# Altium PCB LAB2.PcbDoc
Units mil, origin at the board's own origin, x right, y up, seen from the top; angles counter-clockwise.
Board outline 6000 x 4000 mil, 2 copper layers (Top Layer, Bottom Layer); 50 components, 33 nets, 130 pads, 85 vias.
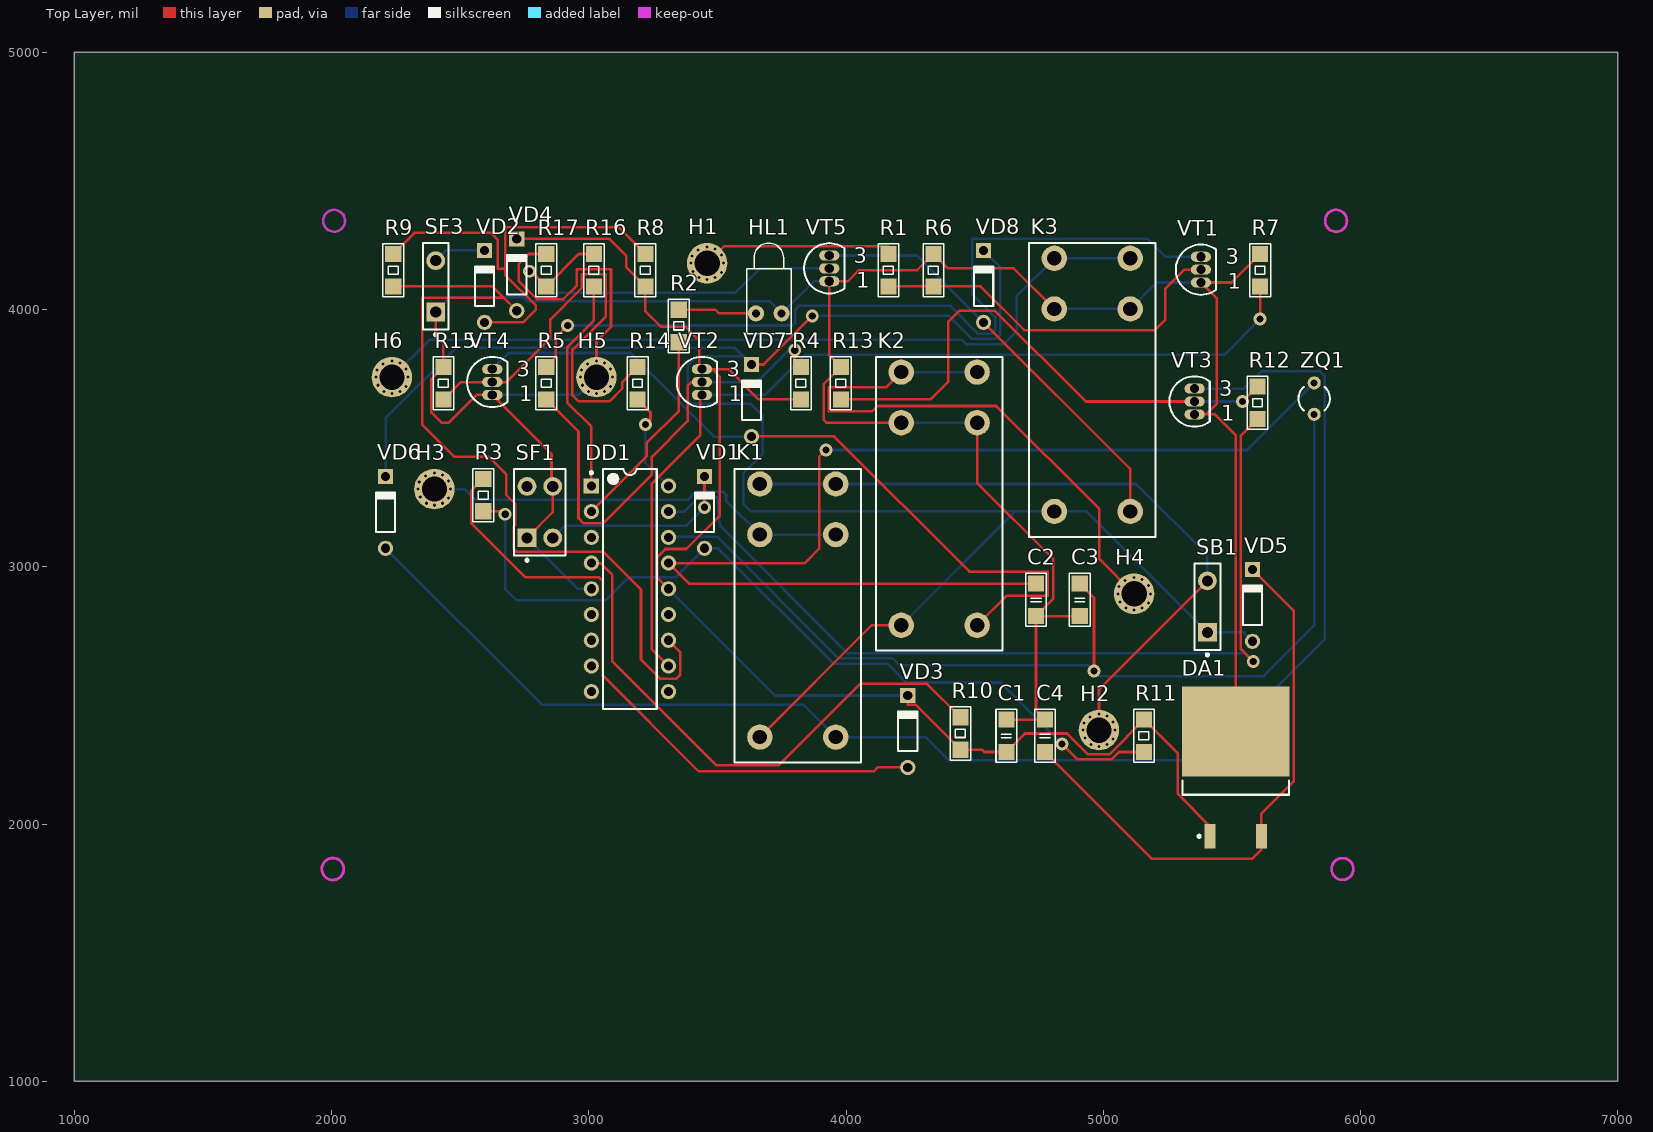
[diagram p0: Top Layer view]
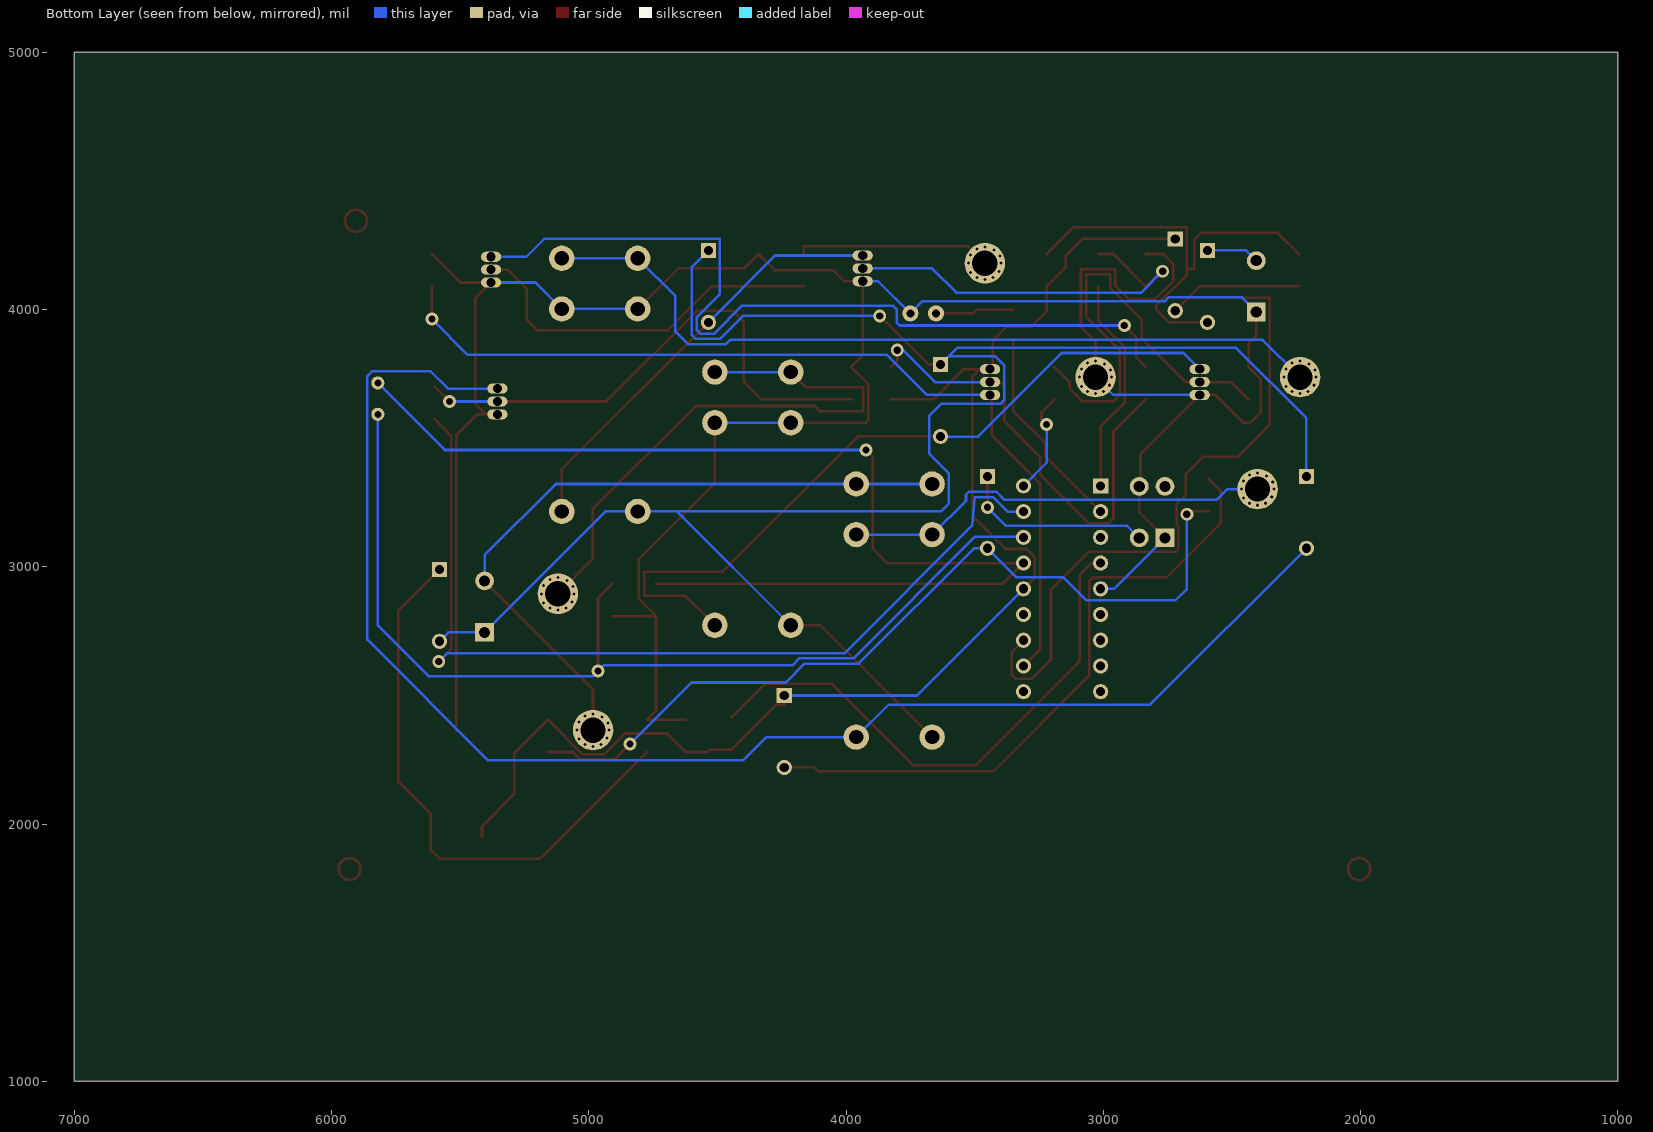
[diagram p1: Bottom Layer view, seen from below]

## Layer stack, top to bottom
Top Solder: solder mask 0.4, Solder Resist, Dk 3.5
Top Layer: signal copper 1.4
Dielectric 1: dielectric 12.6, FR-4, Dk 4.8
Bottom Layer: signal copper 1.4
Bottom Solder: solder mask 0.4, Solder Resist, Dk 3.5

## Board outline
1000,1000 7000,1000 7000,5000 1000,5000

## Design rules (kind name [scope] priority, off if disabled: settings)
Clearance [All] p1: gap=10 ignorepadtopadclearanceinfootprint=FALSE except(0: Arc-Hole Track-Hole SMDPad-Hole THPad-Hole Via-Hole Fill-Hole Poly-Hole Region-Hole Text-Hole)
PolygonConnect [All] p1: connectstyle=Relief reliefconductorwidth=10 reliefentries=4 polygonreliefangle="90 Angle" airgapwidth=10
RoutingVias [All] p1: holewidth=28 width=50 viastyle="Through Hole" minholewidth=28 minwidth=50 maxholewidth=28 maxwidth=50
SolderMaskExpansion [All] p1: expansion=4 istentingtop=FALSE
Width [All] p1: maxlimit=10 minlimit=10 preferedwidth=10
30 further rules are at their usual default settings.

## Components (designator, comment, footprint, x,y, rotation, side; value= is the part's Value field where it differs from the comment)
C1 "0.1uF" "CAPACITOR 1206" 4623.5,2280 r90 top
C2 "22" "CAPACITOR 1206" 4738.5,2808.45 r90 top
C3 "22" "CAPACITOR 1206" 4908.5,2808.45 r90 top
C4 "0.1uF" "CAPACITOR 1206" 4773.5,2280 r90 top
DA1 "78LO5" D2PAK_N 5515,2220 r90 top
DD1 "PIC16F84A-04I/P" PDIP300-P18 3160,2914.37 r0 top
H1 "До замка запалювання" "Hole 2.5" 3460,4180 r0 top
H2 "+12В" "Hole 2.5" 4983.5,2365 r0 top
H3 "До сирени" "Hole 2.5" 2400,3302.1 r0 top
H4 "До системи запалювання" "Hole 2.5" 5120,2895 r0 top
H5 "Загальний" "Hole 2.5" 3030,3737.1 r0 top
H6 "Резерв" "Hole 2.5" 2235,3737.1 r0 top
HL1 "L-56BSRD-B" LED-1 3700,3985 r90 top
K1 "Relay SPST" g2rl-1a-e 3960.28,2337.6 r90 top
K2 "Relay SPST" g2rl-1a-e 4510,2772.6 r90 top
K3 "Relay SPST" g2rl-1a-e 5105,3215 r90 top
R1 "33K" "Resistor 1206" 4165,4090 r90 top
R2 "1K" "Resistor 1206" 3350,3873.16 r90 top
R3 "1K" "Resistor 1206" 2590,3215.55 r90 top
R4 "100K" "Resistor 1206" 3825,3650.55 r90 top
R5 "10K" "Resistor 1206" 2835,3650.55 r90 top
R6 "15K" "Resistor 1206" 4340,4090 r90 top
R7 "91K" "Resistor 1206" 5610,4090 r90 top
R8 "10K" "Resistor 1206" 3220,4090 r90 top
R9 "1K" "Resistor 1206" 2240,4090 r90 top
R10 "10K" "Resistor 1206" 4445,2289.02 r90 top
R11 "10K" "Resistor 1206" 5158.5,2280 r90 top
R12 "4,7K" "Resistor 1206" 5600,3575 r90 top
R13 "10K" "Resistor 1206" 3980,3650.55 r90 top
R14 "4,7K" "Resistor 1206" 3190,3650.55 r90 top
R15 "10K" "Resistor 1206" 2435,3650.55 r90 top
R16 "4,7K" "Resistor 1206" 3020,4090 r90 top
R17 "10K" "Resistor 1206" 2835,4090 r90 top
SB1 "SW-PB" SPST-2 5405,2845 r90 top
SF1 "SW-DPST" DPST-4 2810,3212.4 r90 top
SF3 "SW-SPST" SPST-2 2405,4090 r90 top
VD1 "КД102Б" DO-35 3450,3211.55 r90 top
VD2 "КД102Б" DO-35 2595,4090 r90 top
VD3 "КД522Б" DO-35 4240,2359.76 r90 top
VD4 "КД522Б" DO-35 2720,4135 r90 top
VD5 "КД522Б" DO-35 5580,2850 r90 top
VD6 "КД522Б" DO-35 2210,3211.55 r90 top
VD7 "КД522Б" DO-35 3632.28,3646.55 r90 top
VD8 "КД522Б" DO-35 4535,4090 r90 top
VT1 "КТ503Е" TO-92A 5380,4155 r0 top
VT2 "КТ502Б" TO-92A 3440,3718.11 r0 top
VT3 "КТ315Б" TO-92A 5355,3642.56 r0 top
VT4 "КТ315Б" TO-92A 2625,3718.11 r0 top
VT5 "КТ315Б" TO-92A 3935,4160 r0 top
ZQ1 "4MHZ" R38 5820,3653.68 r0 top

## Footprints (in the part's own frame and the unit in brackets; to place one, negate y for a bottom-side part, rotate by r counter-clockwise, add the part's x,y. Pads: shape width x height; smd on the part's side, far side on the other; paste and mask are expansions set on the pad)
"CAPACITOR 1206" [mm]
  rect 1.6x1.6 smd: 1(0,0) 2(3.2,0)
  silkscreen extent -1.02,-1.02 4.22,1.02, body extent 0.01,-0.8 3.22,0.8, height 1.26
D2PAK_N [mm] "D2-PAK, 4-Leads, Body 8.8x10.4mm, Pitch 2.54mm, Lead Span 15.1mm, IPC Medium Density"
  rect 2.4x1.05 smd: 1(-6.8,2.54) 3(-6.8,-2.54)
  rect 8.9x10.65 smd: 2(3.55,0)
  silkscreen extent -6.92,-5.25 -1.3,5.25, body extent -2.7,-5.28 6.3,5.28, height 4.69
DO-35 [mm] "Diode, Axial; Body 3.8 x 1.9 mm (LxDia. max), Lead Dia. 0.53 mm (max)"
  round 1.5 hole 0.9: 1(-3.55,0)
  rect 1.5x1.5 hole 0.9: 2(3.55,0)
  silkscreen extent -1.95,-0.95 2.05,0.95
DPST-4 [mm] "Switch; 4 Leads"
  rect 1.85x1.85 hole 1.1: 1(-2.54,1.27)
  round 1.85 hole 1.1: 2(-2.54,-1.27) 3(2.54,-1.27) 4(2.54,1.27)
  silkscreen extent -4.88,-2.54 4.28,2.54
g2rl-1a-e [mm] "SPST relay 16A"
  round 2.5 hole 1.4: 0(0,0) 1(0,7.5) 2(20,0) 2(20,7.5) 3(25,0) 3(25,7.5)
  silkscreen extent -2.5,-2.5 26.5,10, body extent -2.6,-2.6 26.4,10.1, height 15.7
"Hole 2.5" [mm]
  round 4 hole 2.5: 0(0,0)
LED-1 [mm] "LED; 2 Leads"
  round 1.6 hole 0.8: 1(0,1.27) 2(0,-1.27)
  silkscreen extent -2,-2.2 6.95,2.2
PDIP300-P18 [mm] "DIP, 18-Pin, Row Spacing 7.62 mm, Pitch 2.54 mm"
  rect 1.5x1.5 hole 0.9: 1(-3.81,10.16)
  round 1.5 hole 0.9: 2(-3.81,7.62) 3(-3.81,5.08) 4(-3.81,2.54) 5(-3.81,0) 6(-3.81,-2.54) 7(-3.81,-5.08) 8(-3.81,-7.62) 9(-3.81,-10.16) 10(3.81,-10.16) 11(3.81,-7.62) 12(3.81,-5.08) 13(3.81,-2.54) 14(3.81,0) 15(3.81,2.54) 16(3.81,5.08) 17(3.81,7.62) 18(3.81,10.16)
  silkscreen extent -3.93,-11.85 2.65,11.85, body extent -3.6,-11.8 3.6,11.8, height 5.33
R38 [mm] "Crystal, Thru-Hole; 2 Leads; Body 3.1 x 8.2 mm (Dia.xH)"
  round 1.3 hole 0.7: 1(0,1.55) 2(0,-1.55)
  silkscreen extent -1.55,-1.19 1.55,1.17
"Resistor 1206" [mm]
  rect 1.6x1.6 smd: 1(0,0) 2(3.2,0)
  silkscreen extent -1.02,-1.02 4.22,1.02, body extent -0.03,-0.79 3.4,0.8, height 0.5
SPST-2 [mm] "Switch; 2 Leads"
  rect 1.85x1.85 hole 1.1: 1(-2.54,0)
  round 1.85 hole 1.1: 2(2.54,0)
  silkscreen extent -4.89,-1.27 4.28,1.27
TO-92A [mm] "TO, Flat Index; 3 In-Line, Axial Leads; Body Dia. 4.5mm; Leads 0.51 x 0.48 mm (max)"
  oval 2x1 hole 0.9: 1(0,-1.27) 2(0,0) 3(0,1.27)
  silkscreen extent -2.48,-2.48 1.5,2.48

## Part data
C1 C2 C3 C4: library part Capasitor
DA1: library part "Volt Reg", "Voltage Regulator", LatestRevisionDate=29-May-2009, LatestRevisionNote="IPC-7351 Footprint Added.", PackageDescription="3-Pin Transistor Outline Package 2.54 mm Pitch, 15.1 mm Lead Span", PackageReference=D2PAK, Published=24-Mar-1999, Publisher="Altium Limited"
DD1: library part CMP-0115-00205-1, "Enhanced FLASH/EEPROM 8-Bit Microcontroller, 1K (x14-Bit words) FLASH, 68 Bytes RAM, 4 MHz, 18-Pin PDIP, Standard VDD Range, Industrial Temperature", Code_JEDEC=MS-001, DatasheetVersion="revB, Aug-2001", PackageDescription="18-Lead Plastic Dual In-Line (P) - 300 mil Body [PDIP]", PackageReference=PDIP300-P18, PackageVersion="revBB, Aug-2009"
H1 H2 H3 H4 H5 H6: library part Hole
HL1: library part LED1, "Typical RED GaAs LED", LatestRevisionDate=08-Jul-2005, LatestRevisionNote="Mech Layer 1 removed.", PackageDescription="LED; 2 Leads", PackageReference=LED-1, Published=8-Jun-2000, Publisher="Altium Limited"
R1 R2 R3 R4 R5 R6 R7 R8 R9 R10 R11 R12 R13 R14 R15 R16 R17: library part Resistor
SB1: "Switch", LatestRevisionDate=17-Jul-2002, LatestRevisionNote="Re-released for DXP Platform.", PackageDescription="Switch; 2 Leads", PackageReference=SPST-2, Published=24-Mar-1999, Publisher="Altium Limited"
SF1: "Double-Pole, Single-Throw Switch", LatestRevisionDate=17-Jul-2002, LatestRevisionNote="Re-released for DXP Platform.", PackageDescription="Switch; 4 Leads", PackageReference=DPST-4, Published=24-Mar-1999, Publisher="Altium Limited"
SF3: "Single-Pole, Single-Throw Switch", LatestRevisionDate=17-Jul-2002, LatestRevisionNote="Re-released for DXP Platform.", PackageDescription="Switch; 2 Leads", PackageReference=SPST-2, Published=24-Mar-1999, Publisher="Altium Limited"
VD1 VD2 VD3 VD4 VD5 VD6 VD7 VD8: library part "Diode 1N4448", "High Conductance Fast Diode", Code_JEDEC=DO-204-AH, ComponentLink1Description="Manufacturer Link", ComponentLink1URL=http://www.fairchildsemi.com/, ComponentLink2Description=Datasheet, ComponentLink2URL=http://www.fairchildsemi.com/ds/1N%2F1N4448.pdf, DatasheetVersion=1997, LatestRevisionDate=17-Jul-2002, LatestRevisionNote="Re-released for DXP Platform.", PackageDescription="Diode, Axial; Body 3.8 x 1.9 mm (LxDia. max), Lead Dia. 0.53 mm (max)", PackageReference=DO-35, Published=8-Jun-2000, Publisher="Altium Limited"
VT1 VT2 VT3 VT4 VT5: library part 2N3904, "NPN General Purpose Amplifier", ComponentLink1Description="Manufacturer Link", ComponentLink1URL=http://www.fairchildsemi.com/, ComponentLink2Description=Datasheet, ComponentLink2URL=http://www.fairchildsemi.com/ds/2N%2F2N3904.pdf, DatasheetVersion=1997, LatestRevisionDate=17-Jan-2003, LatestRevisionNote="PCB Footprint replaced", PackageDescription="TO, Flat Index; 3 In-Line, Axial Leads; Body Dia. 4.5mm; Leads 0.51 x 0.48 mm (max)", PackageReference=TO-92A, PackageVersion=Sep-1998, Published=8-Jun-2000, Publisher="Altium Limited"
ZQ1: library part XTAL, "Crystal Oscillator", LatestRevisionDate=17-Jul-2002, LatestRevisionNote="Re-released for DXP Platform.", PackageDescription="Crystal, Thru-Hole; 2 Leads; Body 3.1 x 8.2 mm (Dia.xH)", PackageReference=R38, Published=8-Jun-2000, Publisher="Altium Limited"

## Via types
v1: diameter 11.81, hole 11.81, Top Layer to Bottom Layer, 72 vias
v2: diameter 50, hole 28, Top Layer to Bottom Layer, 13 vias

## Nets (pads, with @x,y where several pads share a name; then routed paths per layer and width w, separated by ;. In a path a pad name is that pad's centre, name@x,y a point inside that pad or via, vN(x,y) a via of type N, cw(c..) or ccw(c..) an arc to the next point about the centre after c; other vN are vias at no path point)
GND: C1.2 C2.1 C3.1 C4.2 DA1.2 DD1.5 H5.0 HL1.2 K2.2 K3.2 R6.2 R7.2 R13.2 R15.2 R17.2 SF1.1 SF1.3 SF3.1 VT1.1 VT3.1 VT4.1 VT5.1 | length 11541.5
  Top Layer w10: SF3.1 2405,3898 2435,3868 R15.2 2388,3729.54 2388,3600 2428,3560 2455.89,3560 2564,3668.11 VT4.1 2855,3438.11 2855,3312.4 SF1.3 2860,3212.4 SF1.1 ; R17.2 2766.49,4215.98 2728.5,4178 2728.5,4109.5 2798,4040 2900,4040 2953.5,4093.5 2953.5,4156.5 3086.5,4156.5 3086.5,3932.5 3030,3876 v1(3030,3800.09) H5.0 ; K2.2@4214.72,3560 3923.51,3560 3913.5,3570 3913.5,3710.04 R13.2 3935,3821.54 VT5.1 4007,4110 4050,4153 4277.02,4153 R6.2 4395.98,4160 4652.13,4160 K3.2@4809.72,4002.4 ; K2.2@4510,3560 4510,3326.2 4805,3031.21 4805,2874.94 C2.1 ; C1.2 C4.2 4738.5,2440.98 C2.1 ; C3.1 C2.1 ; VT3.1 5400,3592.56 ; DA1.2 5515,3511.56 5434,3592.56 5400,3592.56 ; R7.2 5499.02,4105 VT1.1 5441,4044 5441,3633.56 5400,3592.56
  Bottom Layer w10: SF3.1 2463,4048 2745,4048 2760,4033 3702,4033 HL1.2 3875,4110 VT5.1 ; VT4.1 2961.01,3668.11 H5.0 ; SF1.1 2958.03,2914.37 DD1.5 ; K2.2@4214.72,3560 K2.2@4510,3560 ; K3.2@4809.72,4002.4 5105,4002.4 5207.6,4105 VT1.1
  other v1: 3030,3674.11 2998.5,3681.98 3061.5,3681.98 3085.12,3701.67 2974.88,3705.61 2967.01,3737.1 3092.99,3737.1 2970.94,3764.66 3085.12,3768.6 2994.57,3788.28 3061.5,3792.22
NetC1_1: C1.1 DA1.1 DD1.14 R4.1 R8.1 R10.1 R11.2 VD3.2 VD4.2 VT2.3 | length 5356.6
  Top Layer w10: VD4.2 3080,4274.76 3146,4208.76 3146,4164 R8.1 3220,3993 3280,3933 3376,3933 3429,3880 3429,3768.11 VT2.3 3480,3768.11 ; DD1.14 3265.47,2958.9 3265.47,3036.47 3298,3069 3379,3069 3510,3200 3510,3738.11 3480,3768.11 ; R4.1 3660.45,3650.55 3542.89,3768.11 3480,3768.11 ; VD3.2 4240,2464 4270.02,2464 R10.1 4529,2289.02 4538.02,2280 C1.1 4695.32,2351.82 4860,2351.82 4940.82,2271 5023.52,2271 R11.2 5290,2274.48 5290,2116 5415,1991 DA1.1
  Bottom Layer w10: DD1.14 3724.84,2499.53 VD3.2
NetC2_2: C2.2 DD1.15 ZQ1.1 | length 4471.2
  Top Layer w10: v2(3922,3454) 3896,3428 3896,3070.37 3840,3014.37 DD1.15 3389.94,2934.43 C2.2
  Bottom Layer w10: v2(3922,3454) 5559.3,3454 ZQ1.1
NetC3_2: C3.2 DD1.16 ZQ1.2 | length 4000.3
  Top Layer w10: C3.2 4964,2878.93 v2(4964,2595)
  Bottom Layer w10: DD1.16 3312.63,3117 3497.66,3117 3971.1,2643.56 4182,2643.56 4208.56,2617 4942,2617 v2(4964,2595) 4984,2575 5623,2575 5820,2772 ZQ1.2
NetC4_1: C4.1 DA1.3 VD5.2 | length 2235.7
  Top Layer w10: C4.1 5188.5,1865 5580,1865 5615,1900 DA1.3 5615,2040 5740,2165 5740,2829.76 VD5.2
NetDD1_1: DD1.1 R16.1 | length 857.4
  Top Layer w10: DD1.1 3010,3545.36 2916.26,3639.1 2916.26,3853.26 3020,3957 R16.1
NetDD1_2: DD1.2 R2.1 | length 799.6
  Top Layer w10: DD1.2 3225,3429.37 3225,3480.29 3350,3605.29 R2.1
NetDD1_4: DD1.4 R10.2 | length 2142.6
  Top Layer w10: DD1.4 3046.38,3014.37 3091,2969.75 3091,2634 3497,2228 3738,2228 4055,2545 4315,2545 R10.2
NetDD1_11: DD1.11 R7.1 VT2.1 | length 3583.7
  Top Layer w10: DD1.11 3245.47,2678.9 3245.47,3323.27 3434,3511.8 3434,3668.11 VT2.1 ; v2(5610,3963) R7.1
  Bottom Layer w10: VT2.1 3685.11,3668.11 3841,3824 5471,3824 v2(5610,3963)
NetDD1_12: DD1.12 R9.1 VD4.1 | length 3218.4
  Top Layer w10: R9.1 2625.24,4090 2669.24,4046 ; VD4.1 2669.24,4046 ; DD1.12 3355,2669.37 3355,2579 3340,2564 3279,2564 3203,2640 3203,2911 3055,3059 2719,3059 2708,3070 2708,3157 2715,3164 2715,3244 2679,3280 2679,3360 2612,3427 2478,3427 2353,3552 2353,4046 2669.24,4046
NetDD1_17: DD1.17 R12.1 | length 3606.3
  Top Layer w10: v2(5583,2632) 5535,2680 5535,3510 R12.1
  Bottom Layer w10: DD1.17 3371.37,3214.37 3428,3271 3500,3271 3510,3160.28 4006.71,2663.56 5551.44,2663.56 v2(5583,2632)
NetDD1_18: DD1.18 R14.1 | length 402.5
  Top Layer w10: R14.1 3240,3600.55 3240,3573 v2(3220,3553)
  Bottom Layer w10: v2(3220,3553) 3220,3404.37 DD1.18
NetH1_0: H1.0 R1.2 | length 762.4
  Top Layer w10: H1.0 3526,4246 4165,4246 R1.2
  other v1: 3460,4117.01 3428.5,4124.88 3491.5,4124.88 3515.12,4144.57 3404.88,4148.5 3397.01,4180 3522.99,4180 3400.94,4207.56 3515.12,4211.5 3424.57,4231.18 3491.5,4235.12 3460,4242.99
NetH2_0: H2.0 K1.3 SB1.2 | length 2709.3
  Top Layer w10: H2.0 v1(4983.5,2427.99) 4983.5,2523.5 SB1.2
  Bottom Layer w10: K1.3@3665,3321.85 3960.28,3321.85 5128.15,3321.85 5405,3045 SB1.2
  other v1: 4983.5,2302.01 4952,2309.88 5015,2309.88 5038.62,2329.57 4928.38,2333.5 4920.51,2365 5046.49,2365 4924.44,2392.56 5038.62,2396.5 4948.07,2416.18 5015,2420.12
NetH3_0: H3.0 K1.2 | length 1673.5
  Bottom Layer w10: H3.0 v1(2462.99,3302.1) 2516.9,3302.1 2559,3260 3383.41,3260 3415,3291.59 3521.88,3291.59 3533.46,3280 3533.46,3256.54 3665,3125 K1.2@3960.28,3125
  other v1: 2400,3239.11 2368.5,3246.98 2431.5,3246.98 2455.12,3266.67 2344.88,3270.61 2337.01,3302.1 2340.94,3329.66 2455.12,3333.6 2364.57,3353.28 2431.5,3357.22 2400,3365.09
NetH4_0: H4.0 K2.3 | length 2305.5
  Top Layer w10: K2.3@4214.72,3756.85 4154.92,3697.05 3933.5,3697.05 3933.5,3604 4101,3604 4122,3625 4584,3625 4985,3224 4985,3030 H4.0
  Bottom Layer w10: K2.3@4214.72,3756.85 K2.3@4510,3756.85
  other v1: 5120,2832.01 5088.5,2839.88 5151.5,2839.88 5175.12,2859.57 5064.88,2863.5 5057.01,2895 5182.99,2895 5060.94,2922.56 5175.12,2926.5 5084.57,2946.18 5151.5,2950.12 5120,2957.99
NetH6_0: H6.0 K3.3 | length 3156.4
  Bottom Layer w10: H6.0 2380.29,3882.39 4450.47,3882.39 4467.16,3865.71 4614.71,3865.71 4663,3914 4663,4052.53 4809.72,4199.25 K3.3@5105,4199.25
  other v1: 2235,3674.11 2203.5,3681.98 2266.5,3681.98 2290.12,3701.67 2179.88,3705.61 2172.01,3737.1 2297.99,3737.1 2175.94,3764.66 2290.12,3768.6 2199.57,3788.28 2266.5,3792.22 2235,3800.09
NetHL1_1: HL1.1 R2.2 | length 305.9
  Top Layer w10: R2.2 3492,3999.14 3506.14,3985 HL1.1
NetK1_0: K1.0 VD6.1 VT3.3 | length 5753.7
  Bottom Layer w10: VD6.1 2817.79,2464 3833.87,2464 K1.0 4309.4,2337.6 4400,2247 5391,2247 5861,2717 5861,3742 5843,3760 5614.44,3760 5547,3692.56 VT3.3
NetK1_1: K1.1 K2.1 K3.1 SB1.1 VD5.1 VD6.2 VD7.2 VD8.2 | length 7845.8
  Top Layer w10: VD7.2 3680,3786.32 v2(3868.68,3975) ; K1.1 4100,2772.6 K2.1
  Bottom Layer w10: VD6.2 2210,3578 2483,3851 3567.6,3851 3599.6,3819 ; VD7.2 3599.6,3819 ; v2(3868.68,3975) 4400.47,3975 4489.76,3885.71 4585.24,3885.71 4599.53,3900 4599.53,4165.24 VD8.2 ; K2.1 4657.13,3215 ; VD5.1 5545.24,2745 SB1.1 4935,3215 K3.1 4657.13,3215 ; 3599.6,3819 3420,3819 3385,3784 3385,3648 3400,3633 3630,3633 3677,3586 3677,3440 3600,3363 3600,3246 3631,3215 4657.13,3215
NetK2_0: K2.0 VD7.1 VT4.3 | length 2955.1
  Top Layer w10: VD7.1 3953.9,3506.79 4479.69,2981 4785,2981 4785,2887.94 4625.34,2887.94 K2.0
  Bottom Layer w10: VT4.3 2687.89,3831 3161.57,3831 3486.57,3506 3632.28,3506 VD7.1
NetK3_0: K3.0 VD8.1 VT5.3 | length 1678.9
  Top Layer w10: VD8.1 5105,3380.24 K3.0
  Bottom Layer w10: VT5.3 4275.24,4210 VD8.1
NetR1_1: R1.1 R6.1 VT1.2 | length 1453.1
  Top Layer w10: R1.1 R6.1 4523,4090 4693,3920 5201,3920 5241,3960 5241,4080 5316,4155 VT1.2
NetR3_1: R3.1 R11.1 VD1.1 | length 3317.9
  Top Layer w10: R3.1 2663.45,3215.55 v2(2675,3204) ; v2(4840,2311) 4900,2251 5031.8,2251 5060.8,2280 R11.1
  Bottom Layer w10: v2(2675,3204) 2675,2914 2720,2869 3065,2869 3155,2959 3337.21,2959 VD1.1 3503.07,3071.79 3951.29,2623.56 4160.44,2623.56 4234,2550 4601,2550 v2(4840,2311)
NetR3_2: R3.2 VD3.1 | length 2508.9
  Top Layer w10: R3.2 2543,3294.54 2543,3170 2754,2959 3040,2959 3055,2944 3055,2577 3427,2205 4108,2205 4123,2220 VD3.1
NetR4_2: R4.2 R5.1 VT2.2 | length 1836.3
  Top Layer w10: R5.1 2960,3525.55 2960,3189 2980,3169 3055,3169 3245,3359 3245,3427 3384,3566 3384,3702.11 3400,3718.11 VT2.2 ; v2(3801,3842) 3801,3800.54 R4.2
  Bottom Layer w10: VT2.2 3654.11,3718.11 3778,3842 v2(3801,3842)
NetR5_2: R5.2 VT1.3 | length 3280.8
  Top Layer w10: R5.2 2871,3812.54 2871,3891 v2(2918,3938)
  Bottom Layer w10: v2(2918,3938) 3791,3938 3803,3950 3803,4000 3818,4015 4404,4015 4513.29,3905.71 4565.24,3905.71 4579.53,3920 4579.53,3971.47 4490,4061 4490,4275 5173,4275 5243,4205 VT1.3
NetR8_2: R8.2 R9.2 VD2.1 | length 1769.7
  Top Layer w10: R9.2 2322.02,4298 2620,4298 2646,4272 2646,4159 2675,4159 ; VD2.1 2744.24,3950.24 2794,4000 2794,4015.71 2675,4134.71 2675,4159 ; R8.2 3115.98,4320 2675,4320 2675,4159
NetR12_2: R12.2 R13.1 VT3.2 | length 2069.4
  Top Layer w10: R13.1 4328.55,3650.55 4398,3720 4398,3953 4440,3995 4580,3995 4932.44,3642.56 VT3.2 ; v2(5541.57,3642.56) R12.2
  Bottom Layer w10: VT3.2 v2(5541.57,3642.56)
NetR14_2: R14.2 R15.1 VT4.2 | length 1762.3
  Top Layer w10: R15.1 2502.56,3718.11 VT4.2 2680,3718.11 2850.63,3888.74 2850.63,3961.83 2973.5,4084.7 2973.5,4136.5 3066.5,4136.5 3066.5,3973.5 2936.26,3843.26 2936.26,3666.74 2960,3643 3080,3643 3131,3694 3131,3717.54 R14.2
NetR16_2: R16.2 R17.1 VT5.2 | length 1566.9
  Top Layer w10: v2(2769,4149) 2776,4149 R17.1 2960.98,4215.98 R16.2
  Bottom Layer w10: v2(2769,4149) 2852,4066 3571,4066 3665,4160 VT5.2
NetSF1_2: SF1.2 VD1.2 | length 759.4
  Top Layer w10: v2(3450,3231) VD1.2
  Bottom Layer w10: SF1.2 2906.6,3159 3378,3159 v2(3450,3231)
NetSF3_2: SF3.2 VD2.2 | length 206.5
  Bottom Layer w10: SF3.2 2444.76,4229.76 VD2.2
pads on no net: DD1.3 DD1.6 DD1.7 DD1.8 DD1.9 DD1.10 DD1.13 SF1.4
copper on no net: | length 805.2
  Top Layer w10: 2048.01,1825 ccw(c2005,1825) 2048.01,1825 ; 5947.72,4345 ccw(c5905,4345) 5947.72,4345 ; 5972.43,1825 ccw(c5930,1825) 5972.43,1825

## Keep-outs
Top Layer:
  lines w10: 2047.1,1819.74 cw(c2005,1825) 2047.43,1825 ; 2052.1,4339.74 cw(c2010,4345) 2052.43,4345 ; 5947.1,4339.74 cw(c5905,4345) 5947.43,4345 ; 5972.1,1819.74 cw(c5930,1825) 5972.43,1825

## Silkscreen, mask and mechanical layers (free items; w line width, h text height)
Mechanical 1:
  circle w10: c2005,1825 r43.01
  circle w10: c5930,1825 r42.43
  circle w10: c5905,4345 r42.43
  circle w10: c2010,4345 r43.01
  lines w10: 1870,1695 1870,4365 1990,4485 5930,4485 6060,4355 6060,1700 6050,1690 1875,1690 1870,1695

## Text inside footprints (layer, text, board x,y; h text height)
VT1: Top Overlay "1" at 5484.72,4080.2 h59.05; Top Overlay "3" at 5475.67,4175.08 h59.05
VT2: Top Overlay "1" at 3544.72,3643.31 h59.05; Top Overlay "3" at 3535.67,3738.19 h59.05
VT3: Top Overlay "1" at 5459.72,3567.76 h59.05; Top Overlay "3" at 5450.67,3662.64 h59.05
VT4: Top Overlay "1" at 2729.72,3643.31 h59.05; Top Overlay "3" at 2720.67,3738.19 h59.05
VT5: Top Overlay "1" at 4039.72,4085.2 h59.05; Top Overlay "3" at 4030.67,4180.08 h59.05